# Allegro board METO_STM_CRY_V0_11.brd
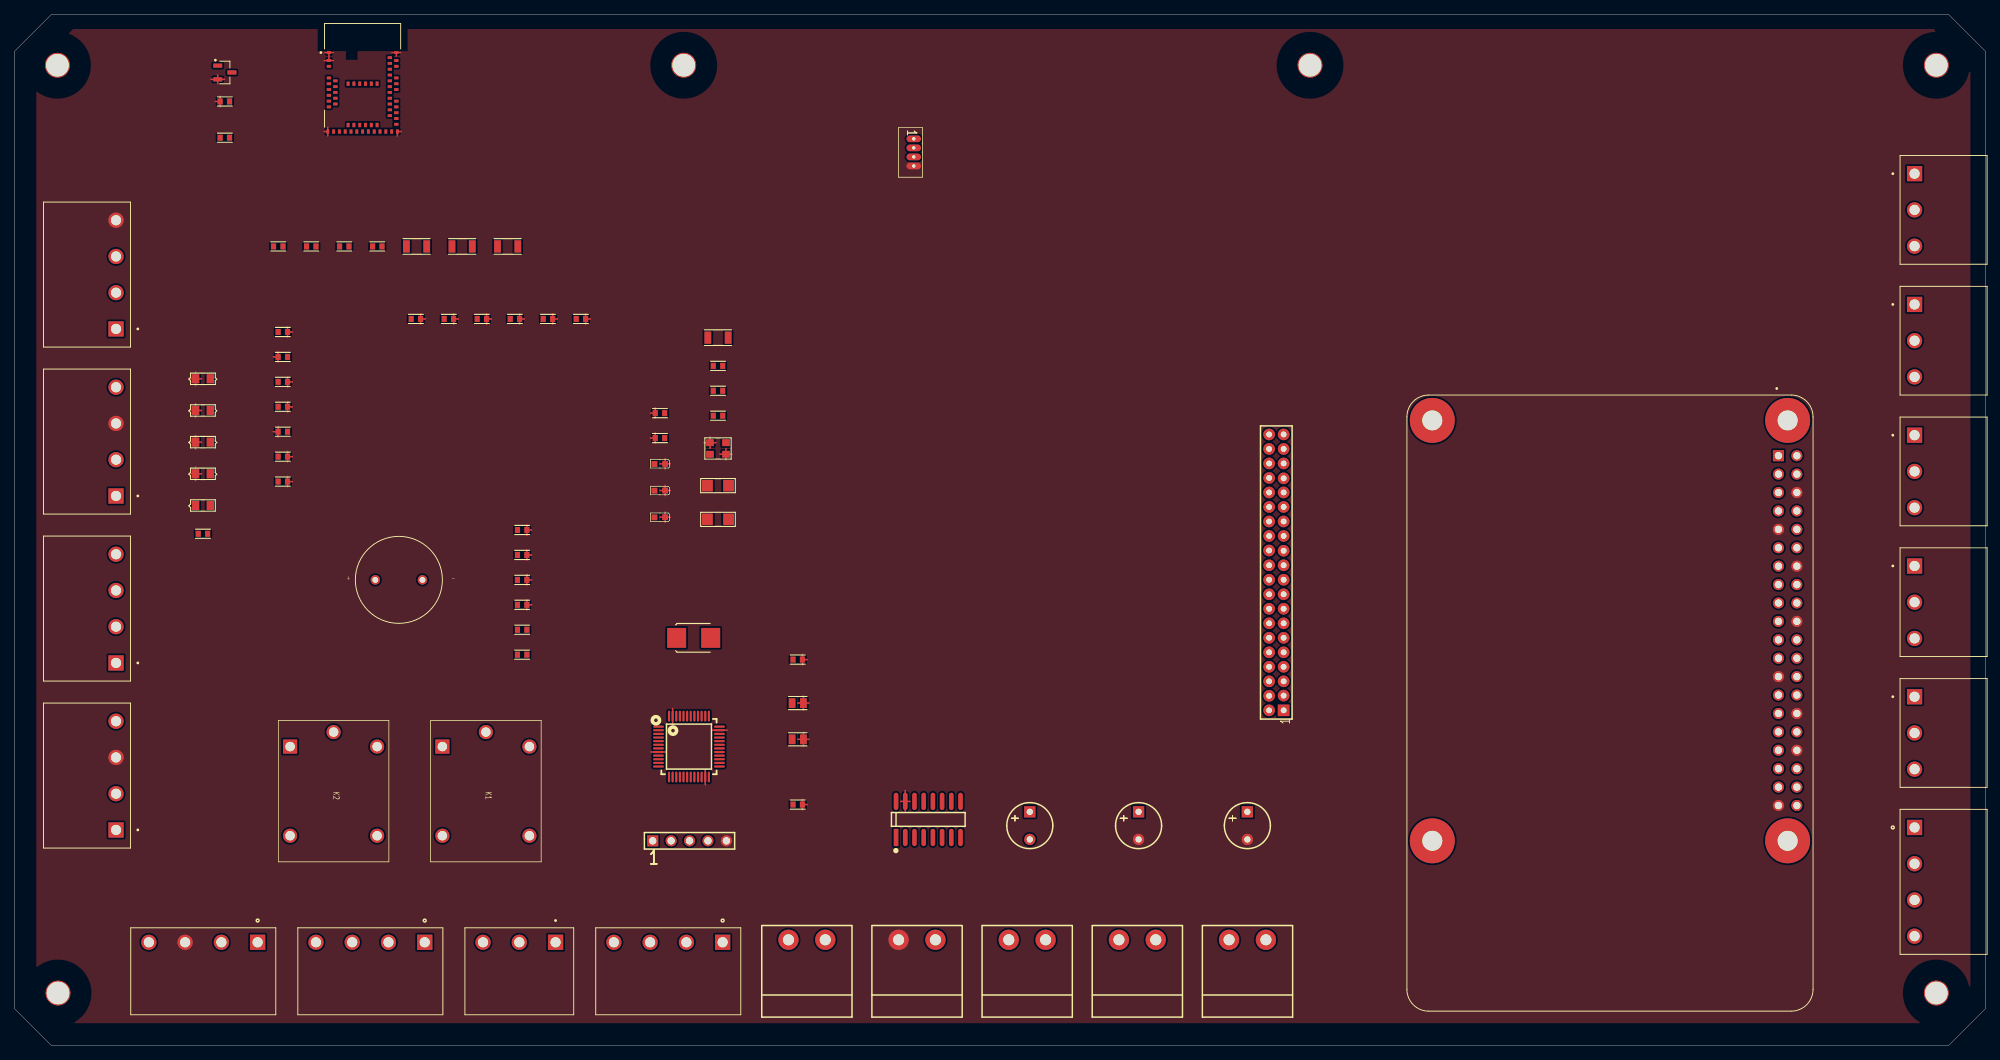
[diagram p0: board, top side]
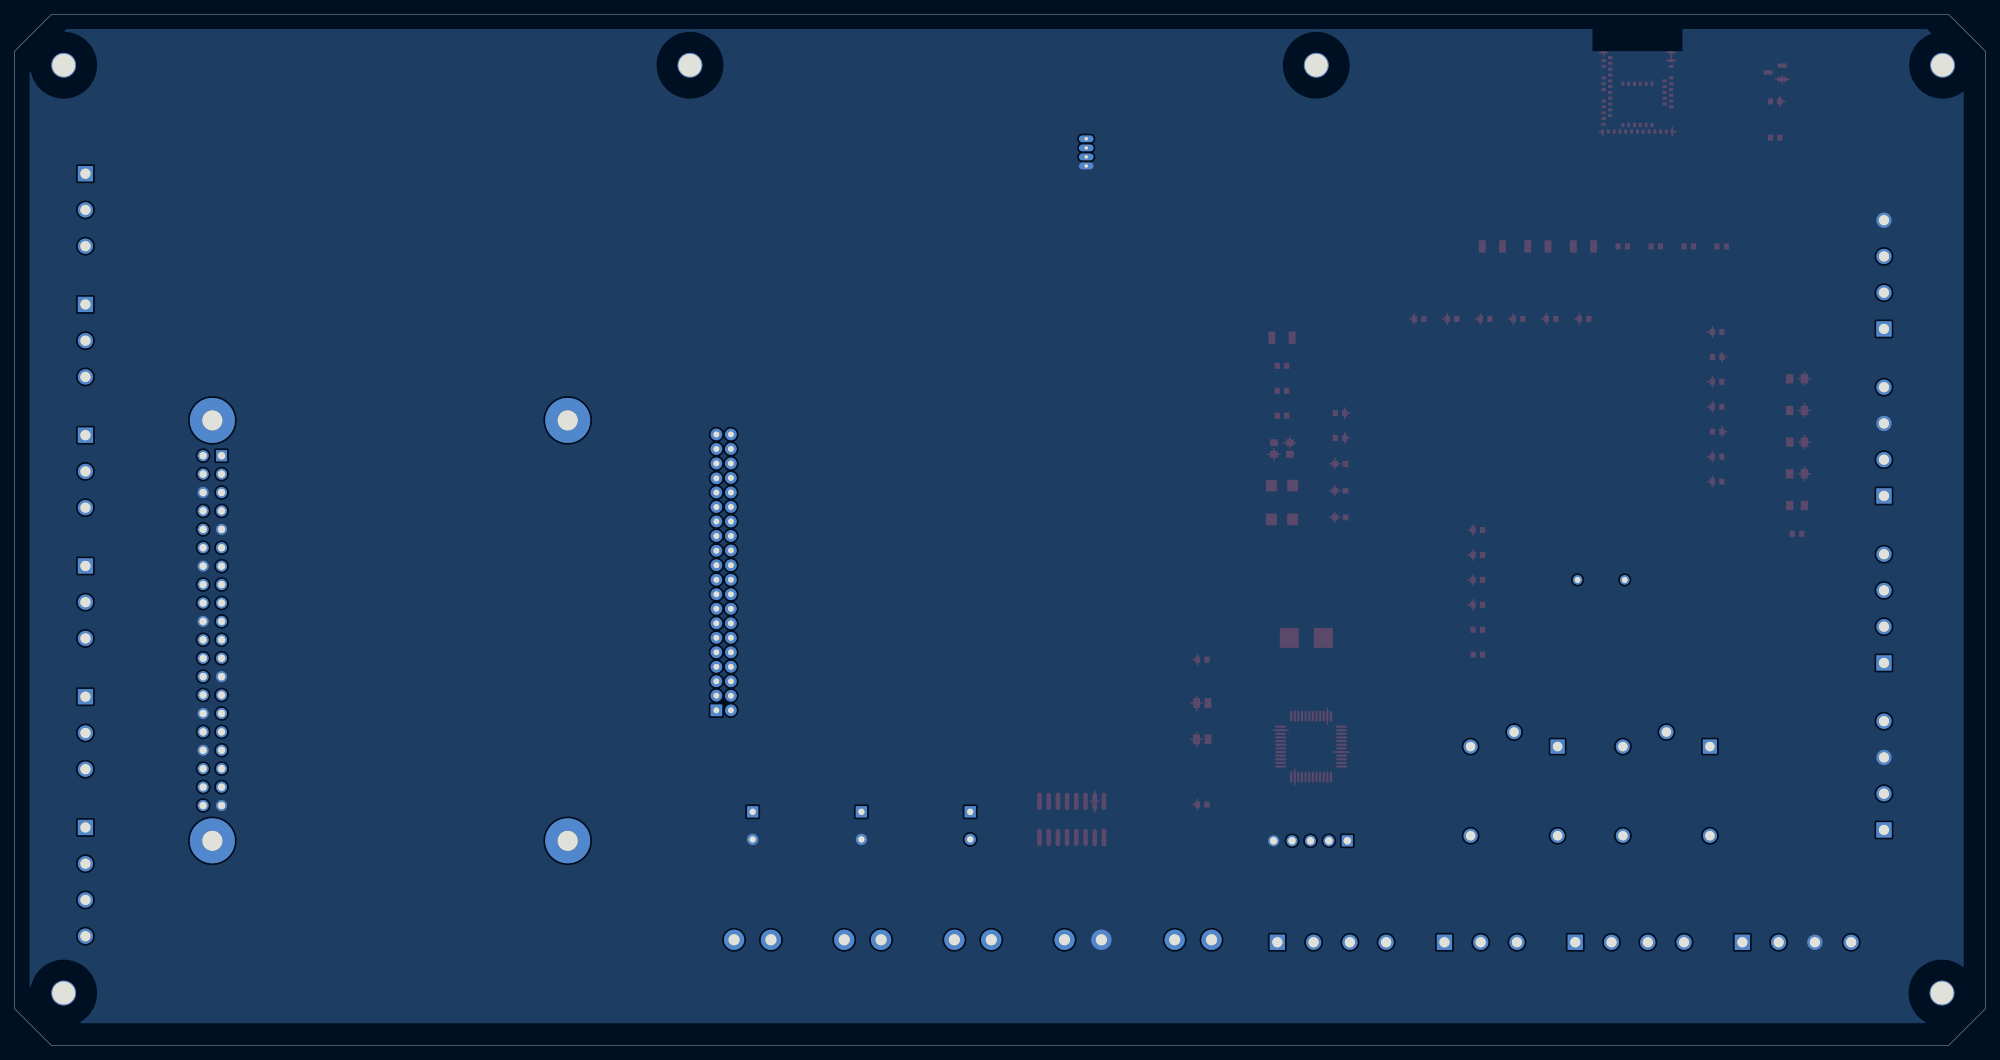
[diagram p1: board, bottom side, seen from below]

Outline 271.78 x 142.24 mm; copper layers: TOP, BOTTOM. Coordinates in mm from the lower left corner of the outline.
Outline path: 0,137.16 0,5.08 5.08,0 266.7,0 271.78,5.08 271.78,137.16 266.7,142.24 5.08,142.24 0,137.16

## Design rules (mm)
constraint set DEFAULT: min track width 0.203

## Placement (name value [footprint] x y rotation side)
C1  100n  [SMC0603]  37 98.44 0 top
C2  18p  [SMC0603]  37 95 0 top
C3  15p  [SMC0603]  37 91.56 0 top
C4  15p  [SMC0603]  37 88.12 0 top
C5  18p  [SMC0603]  37 84.68 0 top
C6  100n  [SMC0603]  37 81.24 0 top
C7  100n  [SMC0603]  37 77.8 0 top
C8  100n  [SMC0603]  70 71.12 0 top
C9  100n  [SMC0603]  70 67.68 0 top
C10  100n  [SMC0603]  70 64.24 0 top
C11  10u/6V3/CER  [SMC0805]  108 47.24 0 top
C12  100n  [SMC0603]  108 33.24 0 top
C13  10u/6V3/CER  [SMC0805]  108 42.24 0 top
C14  100n  [SMC0603]  108 53.24 0 top
C15  CAP POL  [CAPPOL2D250LS150034]  140 32.24 270 top
C16  CAP POL  [CAPPOL2D250LS150034]  170 32.24 270 top
C17  CAP POL  [CAPPOL2D250LS150034]  155 32.24 270 top
C18  100n  [SMC0603]  70 60.8 0 top
C19  220n  [SMC0603]  70 57.36 0 top
C20  220n  [SMC0603]  70 53.92 0 top
C21  220n  [SMC0603]  55.34 100.24 0 top
C22  220n  [SMC0603]  59.9 100.24 0 top
C23  100n  [SMC0603]  64.45 100.24 0 top
C24  100n  [SMC0603]  69 100.24 0 top
C25  100n  [SMC0603]  73.55 100.24 0 top
C26  100n  [SMC0603]  78.1 100.24 0 top
C27  18p  [SMC0603]  89 87.24 0 top
C28  18p  [SMC0603]  89 83.8 0 top
D1  LED-GREEN  [LED_0603]  88.97 80.23 0 top
D2  LED-GREEN  [LED_0603]  88.97 76.54 0 top
D3  LED-GREEN  [LED_0603]  88.97 72.86 0 top
D4  MBRA340T3  [SMDO214AA21]  96 56.24 0 top
D5  SD12C  [SMDSOD323PESD5V]  27 91.98 0 top
D6  SD12C  [SMDSOD323PESD5V]  27 87.61 0 top
D7  SD12C  [SMDSOD323PESD5V]  27 83.24 0 top
D8  SD12C  [SMDSOD323PESD5V]  27 78.87 0 top
D9  1N4148WX  [SMDSOD323SD05T]  27 74.5 0 top
J1  CON40  [HEADER_2MM_2X20]  175 46.24 90 top
J2  CON5  [CON5X140PROG]  88 28.24 0 top
J3  CON2  [2LI_KLEMENS_200MILS]  140.22 14.58 180 top
J4  282811-3  [TE_282811-3]  262 115.28 270 top
J5  282811-4  [TE_282811-4]  14 83.32 90 top
J6  282811-4  [TE_282811-4]  90.15 14.24 180 top
J7  282811-3  [TE_282811-3]  69.61 14.24 180 top
J8  CON2  [2LI_KLEMENS_200MILS]  125.03 14.58 180 top
J9  282811-4  [TE_282811-4]  26.03 14.24 180 top
J10  282811-4  [TE_282811-4]  14 60.28 90 top
J11  282811-3  [TE_282811-3]  262 61.16 270 top
J12  CON2  [2LI_KLEMENS_200MILS]  94.66 14.58 180 top
J13  282811-4  [TE_282811-4]  14 37.24 90 top
J14  282811-4  [TE_282811-4]  49.07 14.24 180 top
J15  282811-3  [TE_282811-3]  262 43.12 270 top
J16  CON2  [2LI_KLEMENS_200MILS]  155.41 14.58 180 top
J17  282811-3  [TE_282811-3]  262 97.24 270 top
J18  282811-4  [TE_282811-4]  14 106.36 90 top
J19  282811-4  [TE_282811-4]  262 22.58 270 top
J20  CON2  [2LI_KLEMENS_200MILS]  109.84 14.58 180 top
J21  282811-3  [TE_282811-3]  262 79.2 270 top
J22  CON4  [CON4125MM]  124 125.09 270 top
K1  JQC-3F-_T73_-1Z-12VDC  [JQC3FT731Z12VDC]  59 41.24 270 top
K2  JQC-3F-_T73_-1Z-12VDC  [JQC3FT731Z12VDC]  38 41.24 270 top
L1  10uH  [SML0603]  25.98 70.6 0 top
LS1  CCG-1206  [CUI_CCG-1206]  53 64.24 0 top
NOREF  -  []  59 41.24 90 top
NOREF#2  -  [unnamed#2]  265 7.24 0 top
NOREF#3  -  []  50 41.24 90 top
NOREF#4  -  []  59 28.94 0 top
NOREF#5  -  [unnamed#2]  6 7.24 0 top
NOREF#6  -  []  59 41.24 0 top
NOREF#7  -  []  71 28.94 90 top
NOREF#8  -  [unnamed#2]  92.28 135.24 0 top
NOREF#9  -  [unnamed#2]  5.92 135.24 0 top
NOREF#10  -  [unnamed#2]  178.64 135.24 0 top
NOREF#11  -  []  38 28.94 0 top
NOREF#12  -  []  50 28.94 90 top
NOREF#13  -  []  71 41.24 90 top
NOREF#14  -  [unnamed#2]  265 135.24 0 top
NOREF#15  -  []  38 41.24 90 top
NOREF#16  -  []  38 41.24 0 top
Q1  BC817  [SOT95P230X110-3N]  29 134.24 0 top
R1  100k  [SMR0603]  29 130.24 0 top
R2  1k5  [SMR0603]  29 125.24 0 top
R3  1k5  [SMR0603]  36.37 110.24 0 top
R4  470R  [SMR0603]  40.92 110.24 0 top
R5  470R  [SMR0603]  45.47 110.24 0 top
R6  470R  [SMR0603]  50.02 110.24 0 top
R7  470R  [SMR1206]  55.44 110.24 0 top
R8  470R  [SMR1206]  61.72 110.24 0 top
R9  470R  [SMR1206]  68 110.24 0 top
R10  470R  [SMR1206]  97 97.66 0 top
R11  33R  [SMR0603]  97 93.77 0 top
R12  1K  [SMR0603]  97 90.33 0 top
R13  180R  [SMR0603]  97 86.89 0 top
U1  STM32L053C8T6  [QFP50P900X900X160-48N]  93 41.24 0 top
U2  RASPBERRY_PI_3_MODEL_B+  [RASPBERRY_PI_3]  220 47.24 270 top
U3  ST3232CDR  [SOG05016WG244L400]  126 31.24 0 top
U4  MDBT50Q-1MV2  [XCVR_MDBT50Q-1MV2]  48 133.24 0 top
Y1  TSX-3225 16.0000MF09Z-AC0  [XTALDFN4]  97 82.37 0 top
Y2  CM315D32768DZFT  [XTAL_CM315_SMD]  97 77.24 0 top
Y3  CM315D32768DZFT  [XTAL_CM315_SMD]  97 72.59 0 top

## Library data of the parts
C1-C14 C23-C28 = CAPACITOR NON-POL
C15-C17 = CAP POL
C18-C22 = CAPACITOR NON-POL: room: rs232
D1-D3 = LED
D4 = 1N5819M/CYL
D5-D8 = DIODE TVS BI-DIR: room: rs232
D9 = DIODE ZENER: room: Buzzer
J1 = CON40
J2 = CON5
J3 J8 J12 J16 J20 = CON2
J4 J7 J11 J15 J17 J21 = 282811-3
J5 J6 J9 J10 J13 J14 J18 J19 = 282811-4
J22 = CON4
K1 K2 = JQC-3F-_T73_2
L1 = INDUCTOR
LS1 = CCG-1206: room: Buzzer
Q1 = BC817: room: Buzzer
R1 = RESISTOR/SM
R2 R3 = RESISTOR/SM_0
R4-R6 = RESISTOR
R7-R10 = RESISTOR/SM_0: room: rs232
R11-R13 = RESISTOR/SM_0: room: Buzzer
U1 = STM32L053C8T6
U2 = RASPBERRY_PI_3_MODEL_B+_0
U3 = ICL232/SO_4: room: rs232
U4 = MDBT50Q-1MV2_0
Y1 = CRYSTAL_3
Y2 Y3 = CRYSTAL/SM

## Footprints (pads in the part's own frame, mm; a bottom-side part is the same pattern mirrored in y, then rotated)
2LI_KLEMENS_200MILS
  round 2.794 hole 1.524: 1(-17.145,0) 2(-12.065,0)
CAPPOL2D250LS150034
  rect 1.549x1.549 hole 0.864: 1(0,0)
  round 1.549 hole 0.864: 2(3.81,0)
CON5X140PROG
  rect 1.524x1.524 hole 1.016: 1(0,0)
  round 1.524 hole 1.016: 2(2.54,0) 3(5.08,0) 4(7.62,0) 5(10.16,0)
CON4125MM
  oval 0.914x1.999 hole 0.457: 1(0,0) 2(1.25,0) 3(2.497,0) 4(3.747,0)
CUI_CCG-1206
  round 1.308 hole 0.8: M(3.25,0) P(-3.25,0)
HEADER_2MM_2X20
  rect 1.6x1.6 hole 0.8: 1(0,0)
  round 1.6 hole 0.8: 2(0,2.002) 3(2.032,0) 4(2.002,2.002) 5(4.003,0) 6(4.003,2.002) 7(6.005,0) 8(6.005,2.002) 9(8.006,0) 10(8.006,2.002) 11(10.008,0) 12(10.008,2.002) 13(12.009,0) 14(12.009,2.002) 15(14.011,0) 16(14.011,2.002) 17(16.012,0) 18(16.012,2.002) 19(18.014,0) 20(18.014,2.002) 21(20.015,0) 22(20.015,2.002) 23(22.017,0) 24(22.052,2.002) 25(24.054,0) 26(24.054,2.002) 27(26.055,0) 28(26.055,2.002) 29(28.057,0) 30(28.057,2.002) 31(30.058,0) 32(30.058,2.002) 33(32.004,0) 34(32.06,2.002) 35(34.061,0) 36(34.061,2.002) 37(36.063,0) 38(36.063,2.002) 39(38.064,0) 40(38.064,2.002)
JQC3FT731Z12VDC
  rect 1.95x1.95 hole 1.3: 1(0,0)
  round 1.95 hole 1.3: 2(12.3,0) 3(12.3,12) 4(0,12) 5(-2,6)
LED_0603
  rect 0.813x0.813 smd: 1(-0.737,0) 2(0.737,0.025)
QFP50P900X900X160-48N
  oval 1.5x0.3 smd: 1(-4.2,2.75) 2(-4.2,2.25) 3(-4.2,1.75) 4(-4.2,1.25) 5(-4.2,0.75) 6(-4.2,0.25) 7(-4.2,-0.25) 8(-4.2,-0.75) 9(-4.2,-1.25) 10(-4.2,-1.75) 11(-4.2,-2.25) 12(-4.2,-2.75) 25(4.2,-2.75) 26(4.2,-2.25) 27(4.2,-1.75) 28(4.2,-1.25) 29(4.2,-0.75) 30(4.2,-0.25) 31(4.2,0.25) 32(4.2,0.75) 33(4.2,1.25) 34(4.2,1.75) 35(4.2,2.25) 36(4.2,2.75)
  oval 0.3x1.5 smd: 13(-2.75,-4.2) 14(-2.25,-4.2) 15(-1.75,-4.2) 16(-1.25,-4.2) 17(-0.75,-4.2) 18(-0.25,-4.2) 19(0.25,-4.2) 20(0.75,-4.2) 21(1.25,-4.2) 22(1.75,-4.2) 23(2.25,-4.2) 24(2.75,-4.2) 37(2.75,4.2) 38(2.25,4.2) 39(1.75,4.2) 40(1.25,4.2) 41(0.75,4.2) 42(0.25,4.2) 43(-0.25,4.2) 44(-0.75,4.2) 45(-1.25,4.2) 46(-1.75,4.2) 47(-2.25,4.2) 48(-2.75,4.2)
RASPBERRY_PI_3
  rect 1.524x1.524 hole 1.016: 1(-34.13,23.23)
  round 1.524 hole 1.016: 2(-34.13,25.77) 3(-31.59,23.23) 4(-31.59,25.77) 5(-29.05,23.23) 6(-29.05,25.77) 7(-26.51,23.23) 8(-26.51,25.77) 9(-23.97,23.23) 10(-23.97,25.77) 11(-21.43,23.23) 12(-21.43,25.77) 13(-18.89,23.23) 14(-18.89,25.77) 15(-16.35,23.23) 16(-16.35,25.77) 17(-13.81,23.23) 18(-13.81,25.77) 19(-11.27,23.23) 20(-11.27,25.77) 21(-8.73,23.23) 22(-8.73,25.77) 23(-6.19,23.23) 24(-6.19,25.77) 25(-3.65,23.23) 26(-3.65,25.77) 27(-1.11,23.23) 28(-1.11,25.77) 29(1.43,23.23) 30(1.43,25.77) 31(3.97,23.23) 32(3.97,25.77) 33(6.51,23.23) 34(6.51,25.77) 35(9.05,23.23) 36(9.05,25.77) 37(11.59,23.23) 38(11.59,25.77) 39(14.13,23.23) 40(14.13,25.77)
  round 6.2 hole 2.75: S1(-39,24.5) S2(19,24.5) S3(19,-24.5) S4(-39,-24.5)
SMC0603
  rect 0.711x0.838 smd: 1(-0.65,0) 2(0.65,0)
SMC0805
  rect 0.94x1.346 smd: 1(-0.78,0) 2(0.78,0)
SMDO214AA21
  rect 2.616x2.743 smd: 1(0,0) 2(-4.699,0)
SMDSOD323PESD5V
  rect 1.016x1.27 smd: 1(0,0) 2(-2.032,0)
SMDSOD323SD05T
  rect 1.016x1.27 smd: 1(0,0) 2(-2.032,0)
SML0603
  rect 0.711x0.838 smd: 1(-0.65,0) 2(0.65,0)
SMR0603
  rect 0.711x0.838 smd: 1(-0.65,0) 2(0.65,0)
SMR1206
  rect 0.94x1.702 smd: 1(-1.4,0) 2(1.4,0)
SOG05016WG244L400
  rect 0.635x2.388 smd: 1(-4.445,-2.54)
  oval 0.635x2.388 smd: 2(-3.175,-2.54) 3(-1.905,-2.54) 4(-0.635,-2.54) 5(0.635,-2.54) 6(1.905,-2.54) 7(3.175,-2.54) 8(4.445,-2.54) 9(4.445,2.438) 10(3.175,2.438) 11(1.905,2.438) 12(0.635,2.438) 13(-0.635,2.438) 14(-1.905,2.438) 15(-3.175,2.438) 16(-4.445,2.438)
SOT95P230X110-3N
  custom 1.26x0.59 smd: 1(-0.98,0.95) 2(-0.98,-0.95) 3(0.98,0)
TE_282811-3
  rect 2.1x2.1 hole 1.4: 1(-5,0)
  round 2.1 hole 1.4: 2(0,0) 3(5,0)
TE_282811-4
  rect 2.1x2.1 hole 1.4: 1(-7.5,0)
  round 2.1 hole 1.4: 2(-2.5,0) 3(2.5,0) 4(7.5,0)
unnamed#2
  round 3.429 hole 3.124: (0,0)
XCVR_MDBT50Q-1MV2
  rect 0.6x0.4 smd: 1(-4.65,3.75) 2(-4.65,2.65) 3(-4.65,1.85) 4(-4.65,0.25) 5(-3.75,-0.15) 6(-4.65,-0.55) 7(-3.75,-0.95) 8(-4.65,-1.35) 9(-3.75,-1.75) 10(-4.65,-2.15) 11(-3.75,-2.55) 12(-4.65,-2.95) 13(-3.75,-3.35) 14(-4.65,-3.75) 34(4.65,-6.15) 35(4.65,-5.35) 36(3.75,-4.95) 37(4.65,-4.55) 38(3.75,-4.15) 39(4.65,-3.75) 40(3.75,-3.35) 41(4.65,-2.95) 42(3.75,-2.55) 43(3.75,-1.75) 44(4.65,-1.35) 45(3.75,-0.95) 46(4.65,-0.55) 47(3.75,-0.15) 48(4.65,0.25) 49(3.75,0.65) 50(3.75,1.45) 51(4.65,1.85) 52(3.75,2.25) 53(4.65,2.65) 54(3.75,3.05) 55(4.65,3.75)
  rect 0.4x0.6 smd: 15(-4.8,-7.15) 16(-4,-7.15) 17(-3.2,-7.15) 18(-2.4,-7.15) 19(-2,-6.25) 20(-1.6,-7.15) 21(-1.2,-6.25) 22(-0.8,-7.15) 23(-0.4,-6.25) 24(0,-7.15) 25(0.4,-6.25) 26(0.8,-7.15) 27(1.2,-6.25) 28(1.6,-7.15) 29(2,-6.25) 30(2.4,-7.15) 31(3.2,-7.15) 32(4,-7.15) 33(4.8,-7.15) 56(-2,-0.55) 57(-1.2,-0.55) 58(-0.4,-0.55) 59(0.4,-0.55) 60(1.2,-0.55) 61(2,-0.55)
XTAL_CM315_SMD
  rect 1.499x1.6 smd: 1(-1.453,0) 2(1.463,0)
XTALDFN4
  rect 1.06x0.95 smd: 1(-1.1,-0.8) 2(1.1,-0.8) 3(1.1,0.8) 4(-1.1,0.8)

## Nets
3.3V: C18.1 U3.16(VCC)
3.3V_BACKUP: C23.1 C24.1 C25.1 J22.1 L1.2 U4.28 U4.30(VDDH)
3.3V_UC: C6.1 C7.1 C8.1 C9.1 C10.1 J2.1 R2.2 R3.2 U1.1 U1.9 U1.24 U1.36 U1.48
3V3: U2.1 U2.17
5V0: U2.2 U2.4
GND: C1.2 C2.1 C3.2 C4.2 C5.1 C6.2 C7.2 C8.2 C9.2 C10.2 C11.2 C12.2 C13.2 C14.2 C16.2 C17.2 C18.2 C21.2 C22.2 C23.2 C24.2 C25.2 C26.2 C27.1 C28.1 D1.2(CATHODE) D2.2(CATHODE) D3.2(CATHODE) D5.2 D6.2 D7.2 D8.2 J2.5 J5.3 J9.3 J13.3 J18.4 J20.2 J22.4 Q1.2(E) R1.1 U1.8 U1.23 U1.35 U1.47(VSS__2) U2.6 U2.9 U2.14 U2.20 U2.25 U2.30 U2.34 U2.39 U3.15 U4.1 U4.2 U4.15 U4.33 U4.55 Y1.2 Y1.4
VBAT_ADC_CON: U1.11
VBUS: U4.32
VDD5V: R11.2
ADC_IN: U1.10
BLE_BLUE: U4.9
BLE_GREEN: U4.11
BLE_RED: U4.10
BUZZER: R13.1
CHC_BLUE: U4.14
CHC_GREN: U4.56
CHC_RED: U4.13
CHR_STAT_1: U4.50
CHR_STAT_2: U4.61
CON_A_PIN_1: J1.1
CON_A_PIN_2: J1.2
CON_A_PIN_3: J1.3
CON_A_PIN_4: J1.4
CON_A_PIN_5: J1.5
CON_A_PIN_6: J1.6
CON_A_PIN_7: J1.7
CON_A_PIN_8: J1.8
CON_A_PIN_9: J1.9
CON_A_PIN_10: J1.10
CON_A_PIN_11: J1.11
CON_A_PIN_12: J1.12
CON_A_PIN_13: J1.13
CON_A_PIN_14: J1.14
CON_A_PIN_15: J1.15
CON_A_PIN_16: J1.16
CON_A_PIN_17: J1.17
CON_A_PIN_18: J1.18
CON_A_PIN_19: J1.19
CON_A_PIN_20: J1.20
CON_A_PIN_21: J1.21
CON_A_PIN_22: J1.22
CON_A_PIN_23: J1.23
CON_A_PIN_24: J1.24
CON_A_PIN_25: J1.25
CON_A_PIN_26: J1.26
CON_A_PIN_27: J1.27
CON_A_PIN_28: J1.28
CON_A_PIN_29: J1.29
CON_A_PIN_30: J1.30
CON_A_PIN_31: J1.31
CON_A_PIN_32: J1.32
CON_A_PIN_33: J1.33
CON_A_PIN_34: J1.34
CON_A_PIN_35: J1.35
CON_A_PIN_36: J1.36
CON_A_PIN_37: J1.37
CON_A_PIN_38: J1.38
CON_A_PIN_39: J1.39
CON_A_PIN_40: J1.40
DBG_LED_1: R4.1 R5.1 R6.1 U1.2
EMSTP_1: C15.1 J3.1
EMSTP_2: C15.2 J3.2
ENCODER_A: C16.1 J18.1
ENCODER_B: C17.1 J18.2
GPS_BLUE: U4.5
GPS_GREEN: U4.7
GPS_RED: U4.6
IMU_NRESET: U4.59
IMU_SCL: U4.16
IMU_SDA: U4.19
INPUT_PIN_1: U1.18
INPUT_PIN_2: U1.19
INPUT_PIN_3: U1.20
INPUT_PIN_4: U1.39
INPUT_PIN_5: U1.40
LCD_PWR_CON: U1.27
NRESET: C1.1 C26.1 J2.4 U1.7 U4.40
OLED_SCL: U4.37
OLED_SDA: U4.39
ON/OFF: U4.38
RC45_RXD0: U3.9
REG_PWR_CON: U4.57
RELAY1_VAC_1: J8.1
RELAY1_VAC_2: J8.2 K1.2
RELAY2_VAC_1: J12.1
RELAY2_VAC_2: J12.2 K2.2
RGB_BLE_CON: U4.8
RGB_CHC_CON: U4.12
RGB_GPS_CON: U4.4
RJ45_RXD1: U3.12
RJ45_TXD0: U3.10
RJ45_TXD1: U3.11
SELENOID_1_RESET: U1.16
SELENOID_1_SET: U1.33
SELENOID_2_RESET: U1.15
SELENOID_2_SET: U1.32
SELENOID_3_RESET: U1.14
SELENOID_3_SET: U1.29
SELENOID_4_RESET: U1.13
SELENOID_4_SET: U1.17
SELENOID_ENABLE: U1.38
SELENOID_SLEEP: U1.28
SENSOR_CON: U1.12
SHIELD: U2.S1 U2.S2 U2.S3 U2.S4
STEP_1_DIR: J5.2
STEP_1_EN: J5.4
STEP_1_STEP: J5.1
STEP_2_DIR: J9.2
STEP_2_EN: J9.4
STEP_2_STEP: J9.1
STEP_3_DIR: J13.2
STEP_3_EN: J13.4
STEP_3_STEP: J13.1
SWCLK: J2.2 J22.2 U1.37 U4.53
SWDIO: J2.3 J22.3 U1.34 U4.51
UC_EXT_RXD: R9.1
UC_EXT_TXD: R7.1
UC_LOADCELL_RXD: R10.1
UC_LOADCELL_TXD: R8.1
UC_OSC_IN: C27.2 U4.17 Y3.2
UC_OSC_OUT: C28.2 U4.18 Y3.1
UC_SCL: R3.1 U1.42
UC_SDA: R2.1 U1.43
UC_UART_RXD: U4.24
UC_UART_TXD: U4.22
USB_DN: U4.34
USB_DP: U4.35
VDC_5V: C11.1 C12.1 D4.1 J18.3 J20.1
VRELAY1_VAC_1: K1.5
VRELAY2_VAC_1: K2.5
N395757: C13.1 C14.1 D4.2(CATHODE)
N410752: R1.2 U1.44
N411240: C3.1 U1.5 Y1.1
N411248: C2.2 U1.4 Y2.1
N411278: C4.1 U1.6 Y1.3
N411286: C5.2 U1.3 Y2.2
N4135191: D2.1 R5.2
N8883662: D9.1 LS1.M Q1.3 R12.1
N8883700: D9.2(CATHODE) LS1.P R11.1 R12.2
N8972366: D6.1 R7.2 U3.14
N8972420: D5.1 R9.2 U3.13
N8972436: C19.1 U3.4
N8972440: C20.1 U3.1
N8972516: C19.2 U3.5
N8972520: C20.2 U3.3
N8972532: C21.1 U3.6
N8972536: C22.1 U3.2
N9011936: D8.1 R8.2 U3.7
N9011974: D7.1 R10.2 U3.8
N9062725: L1.1 U4.31
N90510690: Q1.1 R13.2
N90549461: D1.1 R4.2
N90551041: D3.1 R6.2

Pads without a net: J4 1 2 3; J6 1 2 3 4; J7 1 2 3; J10 1 2 3 4; J11 1 2 3; J14 1 2 3 4; J15 1 2 3; J16 1 2; J17 1 2 3; J19 1 2 3 4; J21 1 2 3; K1 1 3 4; K2 1 3 4; U1 21 22 25 26 30 31 41 45 46; U2 3 5 7 8 10 11 12 13 15 16 18 19 21 22 23 24 26 27 28 29 31 32 33 35 36 37 38 40; U4 3 20 21 23 25 26 27 29 36 41 42 43 44 45 46 47 48 49 52 54 58 60

## Routing (per net, layer and track width the routed paths; a pad name or vN(x,y) marks a point on that pad's centre or on a via; arc(x,y) is an arc through that point)
GND: length 106.1
  TOP w0.203: 24.16,83.24 D7.2 ; D7.2 24.97,84.18 ; D7.2 25.78,83.24 ; D7.2 24.97,82.3 ; 42.7,126.09 U4.15 ; U4.15 43.2,126.69 ; U4.15 43.2,125.49 ; 78.75,99.52 C26.2 ; C26.2 79.41,100.24 ; C26.2 78.75,100.96 ; C4.2 38.31,88.12 ; C4.2 37.65,87.4 ; C4.2 37.65,88.84 ; 28.02,132.69 Q1.2 ; Q1.2 28.95,133.29 ; Q1.2 28.02,133.89 ; Q1.2 27.09,133.29 ; 70.65,66.96 C9.2 ; C9.2 70.65,68.4 ; C9.2 71.31,67.68 ; D1.2 90.42,80.25 ; D1.2 89,80.25 ; D1.2 89.71,79.54 ; D1.2 89.71,80.96 ; 35.69,84.68 C5.1 ; C5.1 36.35,83.96 ; C5.1 36.35,85.4 ; C12.2 108.65,33.96 ; C12.2 108.65,32.52 ; C12.2 109.31,33.24 ; 87.69,83.8 C28.1 ; C28.1 88.35,83.08 ; C28.1 88.35,84.52 ; 97.27,81.57 Y1.2 ; Y1.2 98.1,80.79 ; Y1.2 98.1,82.35 ; Y1.2 98.94,81.57 ; 70.65,63.52 C10.2 ; C10.2 70.65,64.96 ; C10.2 71.31,64.24 ; 53.3,126.09 U4.33 52.8,125.49 ; C21.2 55.99,100.96 ; C21.2 55.99,99.52 ; C21.2 56.65,100.24 ; 37.65,97.72 C1.2 ; C1.2 38.31,98.44 ; C1.2 37.65,99.16 ; C22.2 61.21,100.24 ; C22.2 60.55,99.52 ; C22.2 60.55,100.96 ; 108.01,47.24 C11.2 ; C11.2 108.78,48.22 ; C11.2 109.55,47.24 ; C11.2 108.78,46.26 ; C27.1 88.35,87.96 ; C27.1 87.69,87.24 ; C27.1 88.35,86.52 ; 90.75,44.39 U1.47 90.75,46.5 ; 52.65,136.49 U4.55 ; U4.55 52.05,136.99 ; U4.55 53.25,136.99 ; C13.2 109.55,42.24 ; C13.2 108.78,43.22 ; C13.2 108.78,41.26 ; C13.2 108.01,42.24 ; C8.2 71.31,71.12 ; C8.2 70.65,70.4 ; C8.2 70.65,71.84 ; 24.97,77.93 D8.2 ; D8.2 24.97,79.81 ; D8.2 24.16,78.87 ; D8.2 25.78,78.87 ; 27.69,130.24 R1.1 ; R1.1 28.35,129.52 ; R1.1 28.35,130.96 ; C6.2 37.65,81.96 ; C6.2 37.65,80.52 ; C6.2 38.31,81.24 ; 24.16,87.61 D6.2 ; D6.2 24.97,88.55 ; D6.2 25.78,87.61 ; D6.2 24.97,86.67 ; 108.65,52.52 C14.2 ; C14.2 109.31,53.24 ; C14.2 108.65,53.96 ; 35.69,95 C2.1 ; C2.1 36.35,95.72 ; C2.1 36.35,94.28 ; C23.2 65.1,100.96 ; C23.2 65.76,100.24 ; C23.2 65.1,99.52 ; 74.2,99.52 C25.2 ; C25.2 74.86,100.24 ; C25.2 74.2,100.96 ; 89.71,72.17 D3.2 ; D3.2 90.42,72.89 ; D3.2 89.71,73.6 ; D3.2 89,72.89 ; D2.2 90.42,76.57 ; D2.2 89.71,75.86 ; D2.2 89.71,77.28 ; D2.2 89,76.57 ; C24.2 70.31,100.24 ; C24.2 69.65,100.96 ; C24.2 69.65,99.52 ; Y1.4 96.74,83.17 ; Y1.4 95.07,83.17 ; Y1.4 95.9,82.39 ; Y1.4 95.9,83.95 ; C7.2 37.65,78.52 ; C7.2 38.31,77.8 ; C7.2 37.65,77.08 ; U3.15 122.82,35.18 ; U3.15 122.2,33.68 ; U3.15 123.45,33.68 ; U3.15 122.82,32.18 ; 24.97,91.04 D5.2 ; D5.2 25.78,91.98 ; D5.2 24.97,92.92 ; D5.2 24.16,91.98 ; 95.25,35.99 U1.23 95.25,38.1 ; C18.2 70.65,61.52 ; C18.2 70.65,60.08 ; C18.2 71.31,60.8 ; U4.1 43.95,136.99 ; U4.1 42.75,136.99 ; U4.1 43.35,136.49 ; U4.2 43.35,136.39 ; U4.2 42.75,135.89 ; U4.2 43.95,135.89 ; 98.25,43.49 U1.35 96.14,43.49 ; C3.2 38.31,91.56 ; C3.2 37.65,90.84 ; C3.2 37.65,92.28 ; 89.85,40.49 U1.8 87.74,40.49

## Copper pours and planes (outline as drawn; the poured copper is in the pictures)
GND on TOP, BOTTOM: 8.08,3.08 264.62,3.08 269.7,8.16 269.7,135.16 264.62,140.24 8.08,140.24 3,135.16 3,8.16
